# Altium PCB Misko 3 shield.PcbDoc
Units mil, origin at the board's own origin, x right, y up, seen from the top; angles counter-clockwise.
Board outline 3882.29 x 2098.43 mil, 2 copper layers (Top Layer, Bottom Layer), stack 61.756 mil thick; 7 components, 78 nets, 90 pads, 0 vias.
Unrouted connection lines stored in the file: 6.
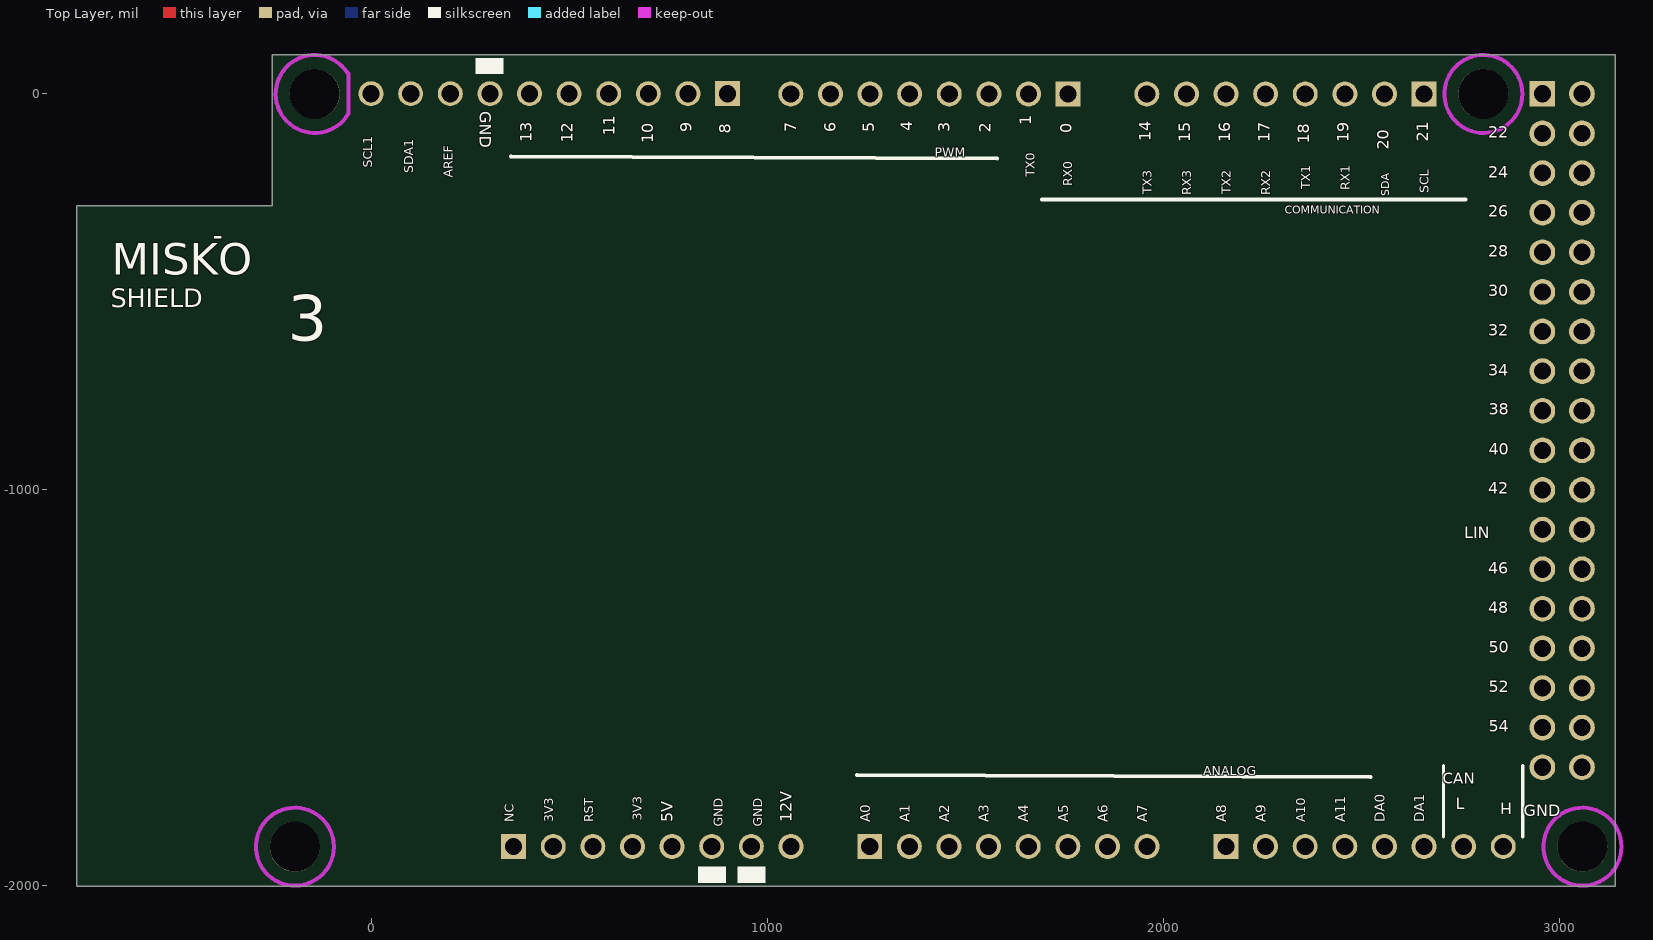
[diagram p0: Top Layer view]
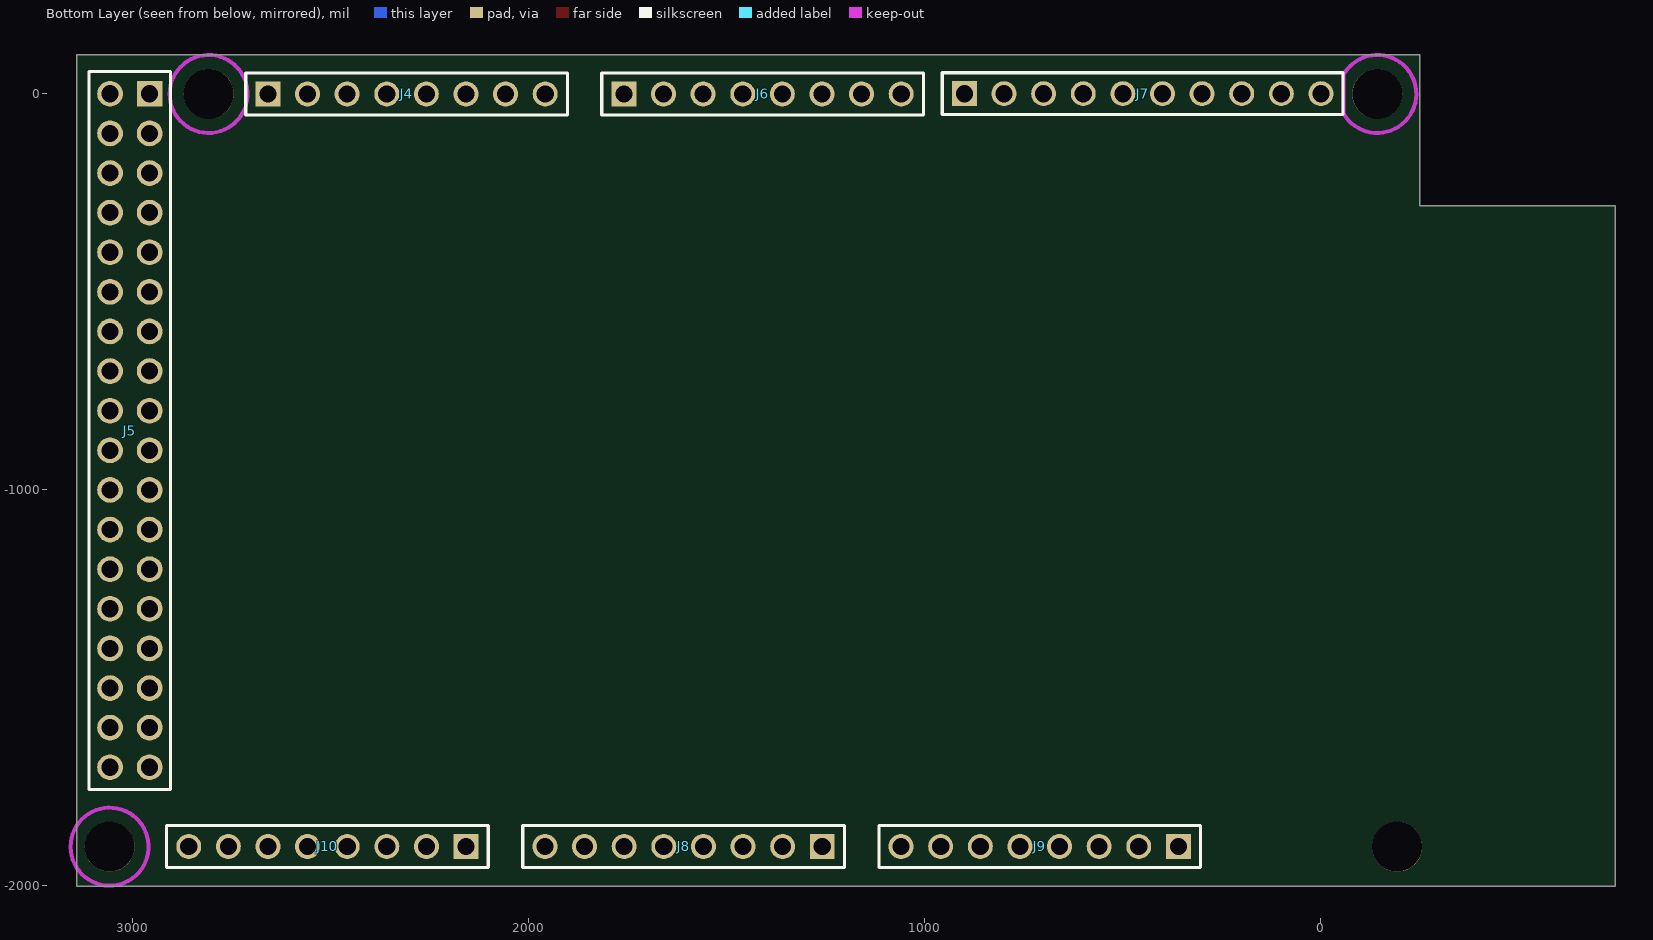
[diagram p1: Bottom Layer view, seen from below]

## Layer stack, top to bottom
Top Solder: solder mask 1, SM-001, Dk 4
Top Layer: signal copper 1.378
Dielectric 1: core 59, Core-043, Dk 4.3
Bottom Layer: signal copper 1.378
Bottom Solder: solder mask 1, SM-001, Dk 4

## Board outline
-742.29,-2000.79 3140,-2000.79 3140,97.64 -249.12,97.63 -249.12,-283 -742.29,-283

## Design rules (kind name [scope] priority, off if disabled: settings)
BoardOutlineClearance [All] p1: gap=7.87 ignorepadtopadclearanceinfootprint=FALSE except(15.75: Arc-SplitBarrior Arc-SplitContinuation Track-SplitBarrior Track-SplitContinuation SMDPad-SplitBarrior SMDPad-SplitContinuation THPad-SplitBarrior THPad-SplitContinuation Via-SplitBarrior Via-SplitContinuation Fill-SplitBarrior Fill-SplitContinuation Poly-SplitBarrior Poly-SplitContinuation Region-SplitBarrior Region-SplitContinuation Text-SplitBarrior Text-SplitContinuation)
Clearance Clearance_USB [InNetClass('USB') vs OnLayer('Mid 3 (P/HS)')] p1: gap=11.81 ignorepadtopadclearanceinfootprint=TRUE except(4.72: Arc-Arc Arc-Track Arc-SMDPad Track-Track Track-SMDPad SMDPad-SMDPad; 5: Arc-Via Track-Via SMDPad-Via THPad-Via Via-Via; 5.91: THPad-THPad; 7.87: Arc-THPad Arc-Hole Track-THPad Track-Hole SMDPad-THPad SMDPad-Hole THPad-Hole Via-Hole Text-Hole; 10: Arc-Text Track-Text SMDPad-Text THPad-Text Via-Text Text-Text; 39.37: Arc-Fill Arc-Poly Arc-Region Track-Fill Track-Poly Track-Region)
Clearance "Clearance Outer LAyers" [(OnLayer('Top (LS)') OR OnLayer('Bottom (HS)'))] p2: gap=7.87 ignorepadtopadclearanceinfootprint=TRUE except(5.91: THPad-THPad; 7.09: Arc-Arc Arc-Track Track-Track; 10: Arc-Text Track-Text SMDPad-Text THPad-Text Via-Text Text-Text; 11.81: SMDPad-Fill SMDPad-Poly SMDPad-Region THPad-Fill THPad-Poly THPad-Region Fill-Fill Fill-Poly Fill-Region Fill-Text Fill-Hole Poly-Poly Poly-Region Poly-Text Poly-Hole Region-Region Region-Text Region-Hole)
Clearance [All] p3: gap=7.87 ignorepadtopadclearanceinfootprint=TRUE except(5.91: THPad-THPad; 6.69: Arc-Arc Arc-Track Track-Track; 10: Arc-Text Track-Text SMDPad-Text THPad-Text Via-Text Text-Text; 11.81: SMDPad-Fill SMDPad-Poly SMDPad-Region THPad-Fill THPad-Poly THPad-Region Fill-Fill Fill-Poly Fill-Region Fill-Text Fill-Hole Poly-Poly Poly-Region Poly-Text Poly-Hole Region-Region Region-Text Region-Hole)
DiffPairsRouting [InDifferentialPairClass('All Differential Pairs')] p1: maxlimit=47.24 minlimit=11.81 mostfreqgap=43.85 toplayer_minwidth=7.09 toplayer_maxwidth=8.66 toplayer_prefwidth=8.66 bottomlayer_minwidth=8.66 bottomlayer_maxwidth=8.66 bottomlayer_prefwidth=8.66 impedanceprofiledriven=TRUE maxuncoupledlength=500
Height [All] p1: minheight=0 maxheight=19685.04 prefheight=500
HoleSize [All] p1: absolutevalues=TRUE maxlimit=248.03 minlimit=7.87 maxpercent=80.000 minpercent=20.000
HoleToHoleClearance [All] p1: gap=15.75 allowstackedmicrovias=TRUE
MatchedLengths [InDifferentialPair ('USB_DATA_DIFF')] p1: tolerance=1000 checknetsindiffpair=FALSE checkdiffpairvsdiffpair=TRUE checkxsignals=TRUE checkothers=TRUE
MinimumAnnularRing [All] p1: minimumring=3
MinimumSolderMaskSliver [All] p1: minsoldermaskwidth=3.94
PasteMaskExpansion [All] p1: expansion=-0.79
PolygonConnect PolygonConnect_1 [All] p1: thpad.connectstyle=Relief thpad.reliefconductorwidth=20 thpad.reliefentries=4 thpad.polygonreliefangle="90 Angle" thpad.airgapwidth=10 smdpad.connectstyle=Relief smdpad.reliefconductorwidth=20 smdpad.reliefentries=4 smdpad.polygonreliefangle="90 Angle" smdpad.airgapwidth=10 via.connectstyle=Direct via.reliefconductorwidth=20 via.reliefentries=4 via.polygonreliefangle="90 Angle" via.airgapwidth=10
RoutingCorners [All] p1: cornerstyle=Round minsetback=100 maxsetback=100
RoutingVias [All] p1: holewidth=19.68 width=39.37 viastyle="Through Hole" minholewidth=7.87 minwidth=19.68 maxholewidth=39.37 maxwidth=78.74
SilkToSilkClearance [All] p1: silktosilkclearance=0.39
SilkToSolderMaskClearance [IsPad] p1: minsilkscreentomaskgap=1.97 clearancetoexposedcopper=TRUE
SolderMaskExpansion SolderMaskExpansion_via [IsVia] p1: expansion=4 istentingtop=TRUE
SolderMaskExpansion [All] p2: expansion=3.94 istentingtop=FALSE
Width [All] p1: maxlimit=39.37 minlimit=5.91 preferedwidth=7.09
21 further rules are at their usual default settings.

## Components (designator, comment, footprint, x,y, rotation, side; value= is the part's Value field where it differs from the comment)
J4 "61300811121" 61300811121 2308.15,-0.79 r180 bottom locked
J5 "61303621121" 61303621121 3006.61,-850.29 r270 bottom locked
J6 "61300811121" 61300811121 1409.52,-0.79 r180 bottom locked
J7 "61301011121" 61301011121 450,0 r180 bottom locked
J8 "61300811121" 61300811121 1608.81,-1900.25 r0 bottom locked
J9 "61300811121" 61300811121 709.85,-1900.25 r0 bottom locked
J10 "61300811121" 61300811121 2507.93,-1900.25 r0 bottom locked

## Footprints (in the part's own frame and the unit in brackets; to place one, negate y for a bottom-side part, rotate by r counter-clockwise, add the part's x,y. Pads: shape width x height; smd on the part's side, far side on the other; paste and mask are expansions set on the pad)
61300811121 [mm] "Pin Header, pitch 2.54 mm, THT, Vertical, single row, 8p"
  rect 1.6x1.6 hole 1.1: 1(-8.89,0)
  round 1.6 hole 1.1: 2(-6.35,0) 3(-3.81,0) 4(-1.27,0) 5(1.27,0) 6(3.81,0) 7(6.35,0) 8(8.89,0)
  silkscreen extent -10.31,-1.35 10.31,1.35, body extent -10.16,-1.27 10.16,1.27, height 8.57
61301011121 [mm] "Pin Header, pitch 2.54 mm, THT, Vertical, single row, 10p"
  rect 1.6x1.6 hole 1.1: 1(-11.43,0)
  round 1.6 hole 1.1: 2(-8.89,0) 3(-6.35,0) 4(-3.81,0) 5(-1.27,0) 6(1.27,0) 7(3.81,0) 8(6.35,0) 9(8.89,0) 10(11.43,0)
  silkscreen extent -12.85,-1.35 12.85,1.35, body extent -12.7,-1.27 12.7,1.27, height 8.57
61303621121 [mm] "Pin Header, pitch 2.54 mm, THT, Vertical, dual row, 36p"
  rect 1.65x1.65 hole 1.1: 1(-21.59,1.27)
  round 1.65 hole 1.1: 2(-21.59,-1.27) 3(-19.05,1.27) 4(-19.05,-1.27) 5(-16.51,1.27) 6(-16.51,-1.27) 7(-13.97,1.27) 8(-13.97,-1.27) 9(-11.43,1.27) 10(-11.43,-1.27) 11(-8.89,1.27) 12(-8.89,-1.27) 13(-6.35,1.27) 14(-6.35,-1.27) 15(-3.81,1.27) 16(-3.81,-1.27) 17(-1.27,1.27) 18(-1.27,-1.27) 19(1.27,1.27) 20(1.27,-1.27) 21(3.81,1.27) 22(3.81,-1.27) 23(6.35,1.27) 24(6.35,-1.27) 25(8.89,1.27) 26(8.89,-1.27) 27(11.43,1.27) 28(11.43,-1.27) 29(13.97,1.27) 30(13.97,-1.27) 31(16.51,1.27) 32(16.51,-1.27) 33(19.05,1.27) 34(19.05,-1.27) 35(21.59,1.27) 36(21.59,-1.27)
  silkscreen extent -23.01,-2.62 23.01,2.62, body extent -22.86,-2.54 22.86,2.54, height 8.59

## Part data
J4 J6 J8 J9 J10: library part CMP-1502-01076-1, "THT Vertical Pin Header WR-PHD, Pitch 2.54 mm, Single Row, 8 pins", Contact Resistance=20mOhm, Manufacturer="Wurth Elektronik", Operating Temperature=-40to105degC, Rated Current=3A, Withstanding Voltage=500VAC, Working Voltage=250VAC, Datasheet URL=https://katalog.we-online.de/em/datasheet/6130xx11121.pdf, Gender=Male, Manufacturer URL=http://www.we-online.de, Mounting Technology=THT, Orientation=Vertical, Package Reference=61300811121, Packaging=Bag, Part Number=61300811121, Pin Number=8, Pitch=2.54mm, Publisher=WurthElektronik, Row Number=Single
J5: library part CMP-1502-01131-1, "THT Vertical Pin Header WR-PHD, Pitch 2.54 mm, Dual Row, 36 pins", Contact Resistance=20mOhm, Manufacturer="Wurth Elektronik", Operating Temperature=-40to105degC, Rated Current=3A, Withstanding Voltage=500VAC, Working Voltage=250VAC, Datasheet URL=https://katalog.we-online.de/em/datasheet/6130xx21121.pdf, Gender=Male, Manufacturer URL=http://www.we-online.de, Mounting Technology=THT, Orientation=Vertical, Package Reference=61303621121, Packaging=Bag, Part Number=61303621121, Pin Number=36, Pitch=2.54mm, Publisher=WurthElektronik, Row Number=Dual
J7: library part CMP-1502-01082-1, "THT Vertical Pin Header WR-PHD, Pitch 2.54 mm, Single Row, 10 pins", Contact Resistance=20mOhm, Manufacturer="Wurth Elektronik", Operating Temperature=-40to105degC, Rated Current=3A, Withstanding Voltage=500VAC, Working Voltage=250VAC, Datasheet URL=https://katalog.we-online.de/em/datasheet/6130xx11121.pdf, Gender=Male, Manufacturer URL=http://www.we-online.de, Mounting Technology=THT, Orientation=Vertical, Package Reference=61301011121, Packaging=Bag, Part Number=61301011121, Pin Number=10, Pitch=2.54mm, Publisher=WurthElektronik, Row Number=Single

## Free pads (board coordinates)
  round 125.98 hole 125.98 unplated: MH1(3057.71,-1900.79) MH2(-142.29,-0.79) MH3(2807.71,-0.79) MH4(-192.29,-1900.79)

## Nets (pads, with @x,y where several pads share a name; then routed paths per layer and width w, separated by ;. In a path a pad name is that pad's centre, name@x,y a point inside that pad or via, vN(x,y) a via of type N, cw(c..) or ccw(c..) an arc to the next point about the centre after c; other vN are vias at no path point)
+3V3: J9.2 J9.4
+5: J5.1 J5.2 J9.5
+12: J9.8
AD0_1: J8.1
AD1_1: J8.2
AD2_1: J8.3
AD3_1: J8.4
AD4_1: J8.5
AD5_1: J8.6
AD6_1: J8.7
AD7_1: J8.8
AD8_1: J10.1
AD9_1: J10.2
AD10_1: J10.3
AD11_1: J10.4
AREF: J7.8
BKLT_1: J5.29
CANH_1: J10.8
CANL_1: J10.7
CS1_1: J5.21
DAC1_1: J10.5
DAC2_1: J10.6
FLASH_CS_1: J5.26
FMC_D0_1: J5.18
FMC_D1_1: J5.17
FMC_D2_1: J5.16
FMC_D3_1: J5.15
FMC_D4_1: J5.14
FMC_D5_1: J5.13
FMC_D6_1: J5.12
FMC_D7_1: J5.11
FMC_D8_1: J5.3
FMC_D9_1: J5.4
FMC_D10_1: J5.5
FMC_D11_1: J5.6
FMC_D12_1: J5.7
FMC_D13_1: J5.8
FMC_D14_1: J5.9
FMC_D15_1: J5.10
GND: J5.35 J5.36 J7.7 J9.6 J9.7
I2C1_SCL_1: J7.10
I2C1_SDA_1: J7.9
I2C2_SCL_1: J4.1
I2C2_SDA_1: J4.2
LCD_RD_1: J5.24
LCD_RS_1: J5.19
LCD_RST_1: J5.22
LCD_WR_1: J5.20
LIN_BUS_1: J5.23
MISO_1: J5.31
MOSI_1: J5.32
PWM2_1: J6.3
PWM3_1: J6.4
PWM4_1: J6.5
PWM5_1: J6.6
PWM6_1: J6.7
PWM7_1: J6.8
PWM8_1: J7.1
PWM9_1: J7.2
PWM10_1: J7.3
PWM11_1: J7.4
PWM12_1: J7.5
PWM13_1: J7.6
QSPI_IO0_1: J5.27
QSPI_IO1_1: J5.28
QSPI_IO2_1: J5.30
RESET_1: J9.3
SCK_1: J5.33
TCH_CS_1: J5.34
TCH_PENIRQ_1: J5.25
UART4_RX_1: J4.5
UART4_TX_1: J4.6
USART1_RX_1: J6.1
USART1_TX_1: J6.2
USART2_RX_1: J4.3
USART2_TX_1: J4.4
USART5_RX_1: J4.7
USART5_TX_1: J4.8
pads on no net: J9.1

## Keep-outs
Top Layer:
  circle w10: c-192.29,-1900.79 r98.43
  circle w10: c3057.71,-1900.79 r98.43
  circle w10: c2807.71,-0.79 r98.43
  lines w10: -58.72,51.2 ccw(c-142.29,-0.79) -57.32,-50.45 -57.32,51.2 -58.72,51.2
Bottom Layer:
  circle w10: c3057.71,-1900.79 r98.43
  circle w10: c2807.71,-0.79 r98.43
  lines w10: -58.72,51.2 ccw(c-142.29,-0.79) -57.32,-50.45 -57.32,51.2 -58.72,51.2

## Silkscreen, mask and mechanical layers (free items; w line width, h text height)
Top Overlay:
  region: 996,-1950.54 925.12,-1950.54 925.12,-1992.71 996,-1992.71
  region: 896,-1950.54 825.12,-1950.54 825.12,-1992.77 896,-1992.77
  rectangle: 263.84,50.29 334.72,89.65
  lines w7.87: 2707.19,-1875.99 2707.19,-1695.5 ; 2907.19,-1875.99 2907.19,-1695.5
  lines w9.84: 352.84,-158.31 1580.53,-163.28 ; 1226.23,-1720.04 2523.17,-1725.28 ; 1693.89,-266.9 2762.73,-266.9
  text "GND" at 263.9,-44.44 h51.18 r270
  text "1" at 1677.13,-80.31 h51.18 r90
  text "4" at 1375.56,-94.93 h51.18 r90
  text "7" at 1083.53,-96.82 h51.18 r90
  text "3" at 1470.5,-97.1 h51.18 r90
  text "9" at 819.02,-97.34 h51.18 r90
  text "6" at 1182.79,-97.34 h51.18 r90
  text "5" at 1280.61,-97.25 h51.18 r90
  text "2" at 1574.07,-98.05 h51.18 r90
  text "8" at 917.43,-100.89 h51.18 r90
  text "0" at 1779.28,-100.37 h51.18 r90
  text "11" at 624.76,-105.66 h51.18 r90
  text "14" at 1978.46,-120.28 h51.18 r90
  text "21" at 2678.46,-121.79 h51.18 r90
  text "22" at 2820.01,-121.73 h51.18
  text "13" at 415.42,-122.46 h51.18 r90
  text "15" at 2078.46,-122.69 h51.18 r90
  text "16" at 2178.46,-122.69 h51.18 r90
  text "17" at 2278.46,-122.17 h51.18 r90
  text "19" at 2478.46,-122.65 h51.18 r90
  text "12" at 518.68,-123.35 h51.18 r90
  text "10" at 721.89,-125.72 h51.18 r90
  text "18" at 2378.46,-126.24 h51.18 r90
  text "20" at 2578.46,-141.85 h51.18 r90
  text "PWM" at 1423.22,-166.78 h39.37
  text "SCL1" at 10.86,-186.47 h39.37 r90
  text "SDA1" at 113.82,-200.89 h39.37 r90
  text "TX0" at 1683.08,-209.45 h39.37 r90
  text "AREF" at 213.51,-212.7 h39.37 r90
  text "24" at 2820.01,-221.73 h51.18
  text "RX0" at 1777.38,-233.51 h39.37 r90
  text "TX1" at 2377.79,-240.7 h39.37 r90
  text "RX1" at 2477.79,-243.39 h39.37 r90
  text "SCL" at 2677.77,-251.69 h39.37 r90
  text "TX3" at 1977.79,-253.62 h39.37 r90
  text "TX2" at 2177.79,-254.31 h39.37 r90
  text "RX3" at 2077.79,-256.31 h39.37 r90
  text "RX2" at 2277.79,-257 h39.37 r90
  text "SDA" at 2577.35,-258.66 h35.43 r90
  text "COMMUNICATION" at 2305.99,-310.78 h35.43
  text "26" at 2820.51,-321.23 h51.18
  text "-" at -400,-400 h90.55
  text "28" at 2820.51,-421.23 h51.18
  text "MISKO" at -654.56,-483.08 h137.8
  text "30" at 2820.56,-521.23 h51.18
  text "SHIELD" at -657.57,-554.9 h80
  text "32" at 2820.31,-621.48 h51.18
  text "3" at -210.25,-660.94 h196.85
  text "34" at 2820.56,-721.56 h51.18
  text "38" at 2820.81,-820.98 h51.18
  text "40" at 2820.81,-920.98 h51.18
  text "42" at 2819.54,-1019.72 h51.18
  text "LIN" at 2759.28,-1132.46 h51.18
  text "46" at 2820.31,-1221.48 h51.18
  text "48" at 2820.56,-1321.56 h51.18
  text "50" at 2820.81,-1420.98 h51.18
  text "52" at 2820.81,-1520.98 h51.18
  text "54" at 2820.81,-1620.98 h51.18
  text "ANALOG" at 2100.46,-1727.87 h39.37
  text "CAN" at 2705.67,-1751.56 h47.24
  text "H" at 2880.44,-1779.93 h51.18 r180
  text "L" at 2737.74,-1816.63 h51.18
  text "GND" at 2909.28,-1833.47 h51.18
  text "3V3" at 690.78,-1835.44 h39.37 r90
  text "NC" at 367.8,-1839.37 h39.37 r90
  text "3V3" at 467.82,-1839.37 h39.37 r90
  text "RST" at 567.8,-1839.37 h39.37 r90
  text "5V" at 772,-1839.37 h51.18 r90
  text "12V" at 1072,-1839.37 h51.18 r90
  text "A0" at 1268.45,-1839.64 h43.31 r90
  text "A1" at 1368.45,-1839.64 h43.31 r90
  text "A2" at 1468.45,-1839.64 h43.31 r90
  text "A3" at 1568.45,-1839.64 h43.31 r90
  text "A4" at 1668.18,-1839.37 h43.31 r90
  text "A5" at 1768.18,-1839.37 h43.31 r90
  text "A6" at 1868.18,-1839.37 h43.31 r90
  text "A7" at 1968.18,-1839.37 h43.31 r90
  text "A8" at 2167.3,-1839.37 h43.31 r90
  text "A9" at 2267.3,-1839.37 h43.31 r90
  text "A10" at 2365.89,-1839.37 h39.37 r90
  text "A11" at 2467.3,-1839.37 h43.31 r90
  text "DA0" at 2567.3,-1839.37 h43.31 r90
  text "DA1" at 2667.3,-1839.37 h43.31 r90
  text "GND" at 895.38,-1850.25 h39.37 r90
  text "GND" at 995.38,-1850.25 h39.37 r90
Bottom Overlay:
Board:
  the board outline again, w7.87